# Allegro board panelized_board.brd
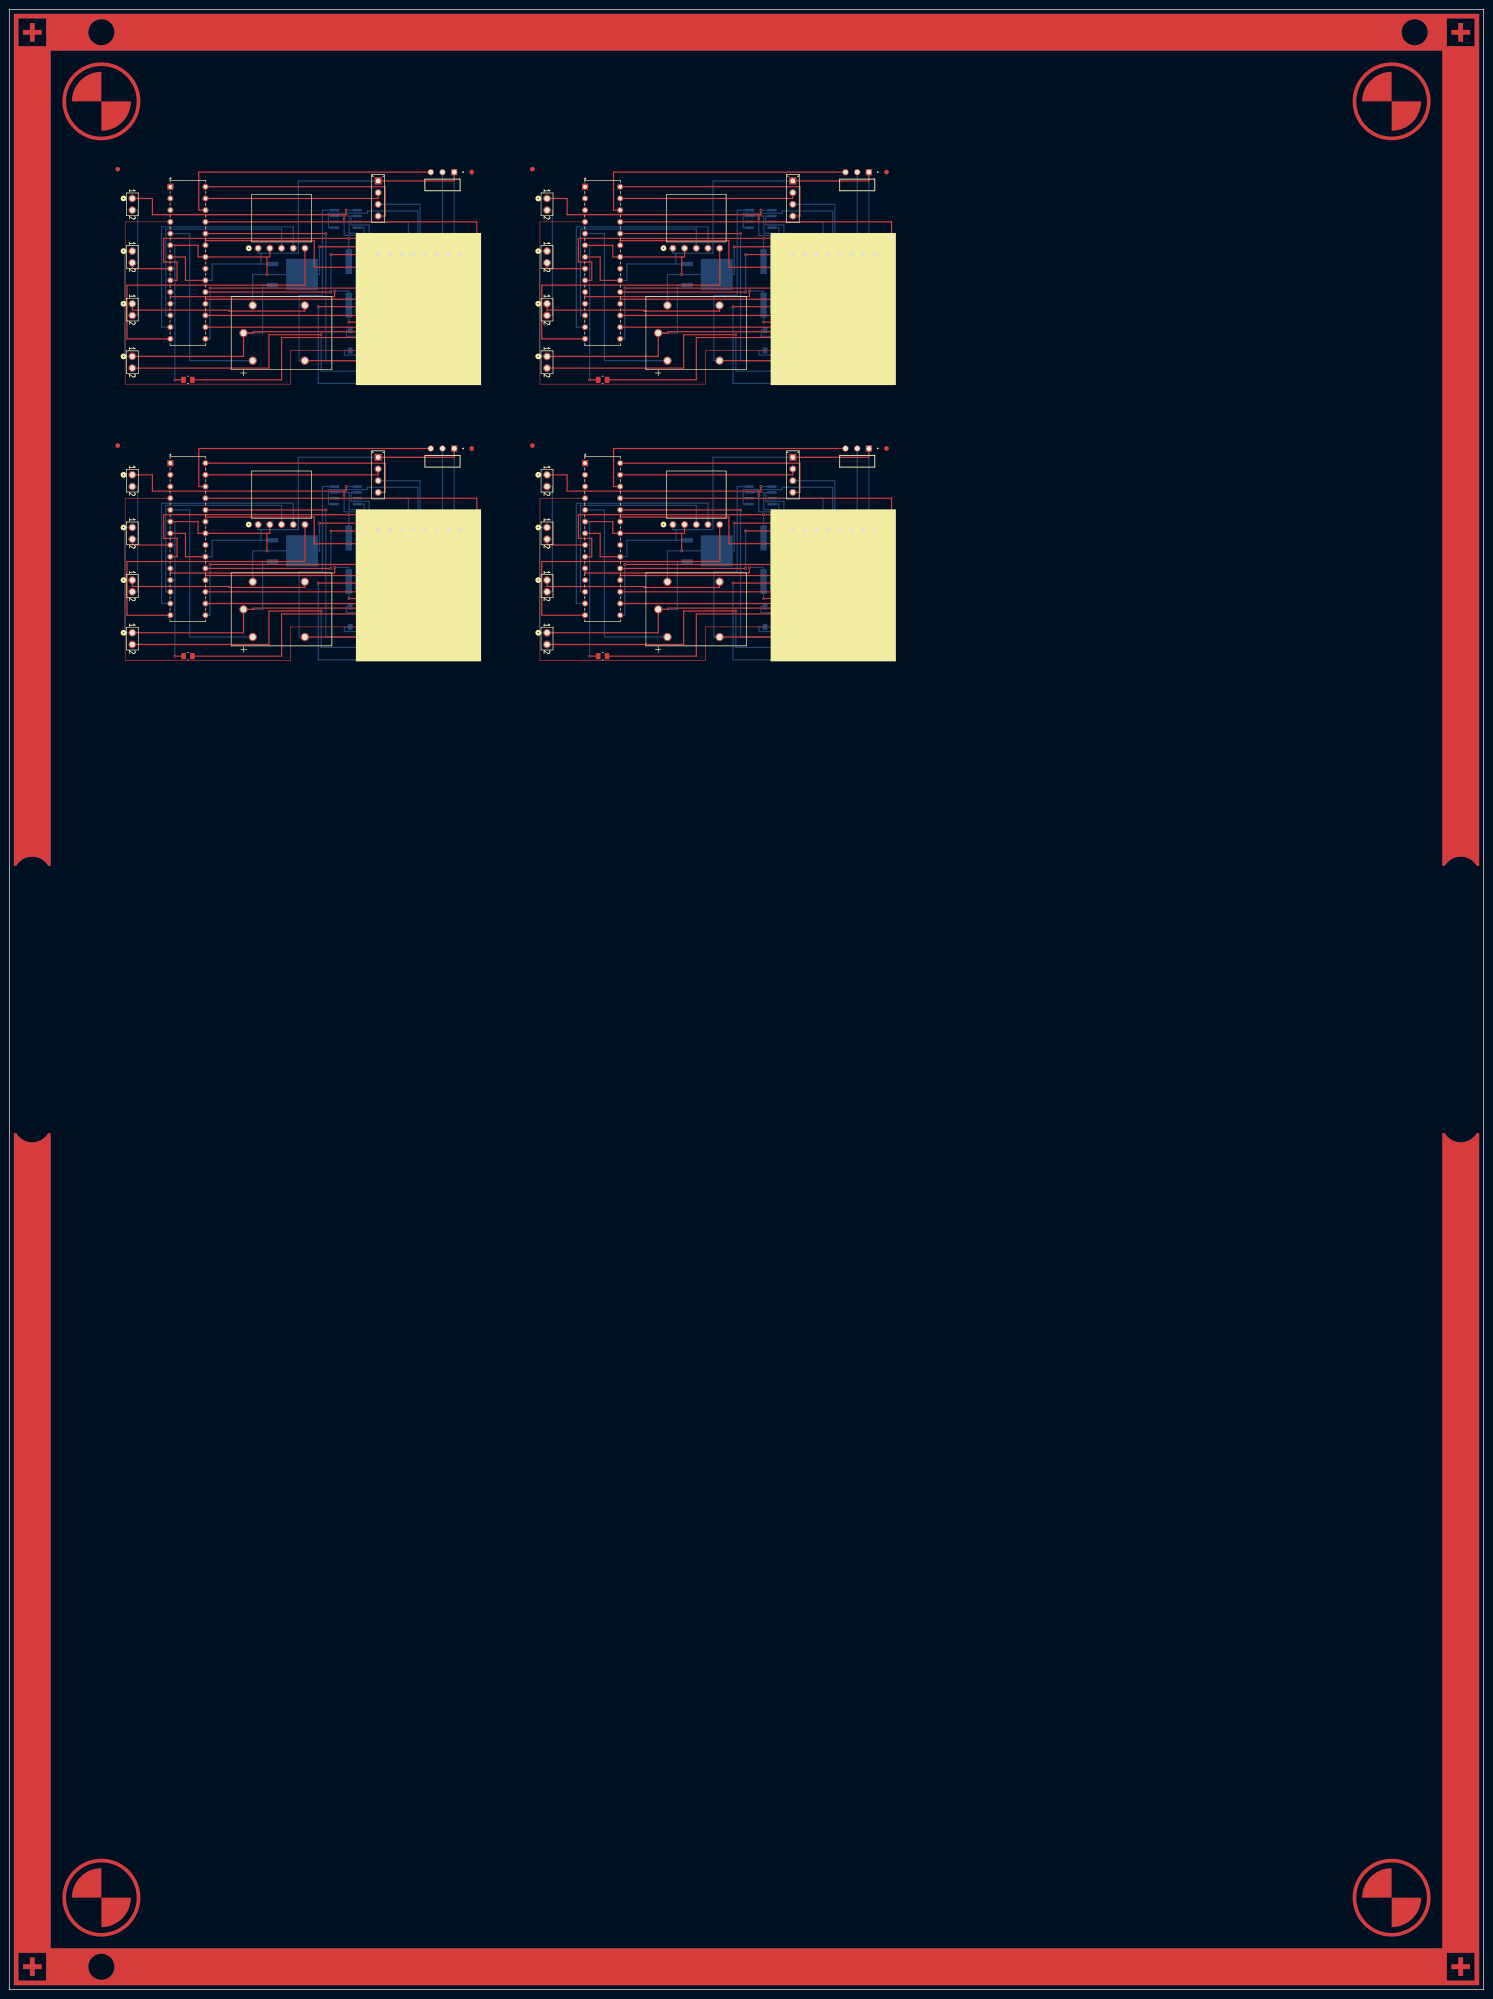
[diagram p0: board, top side]
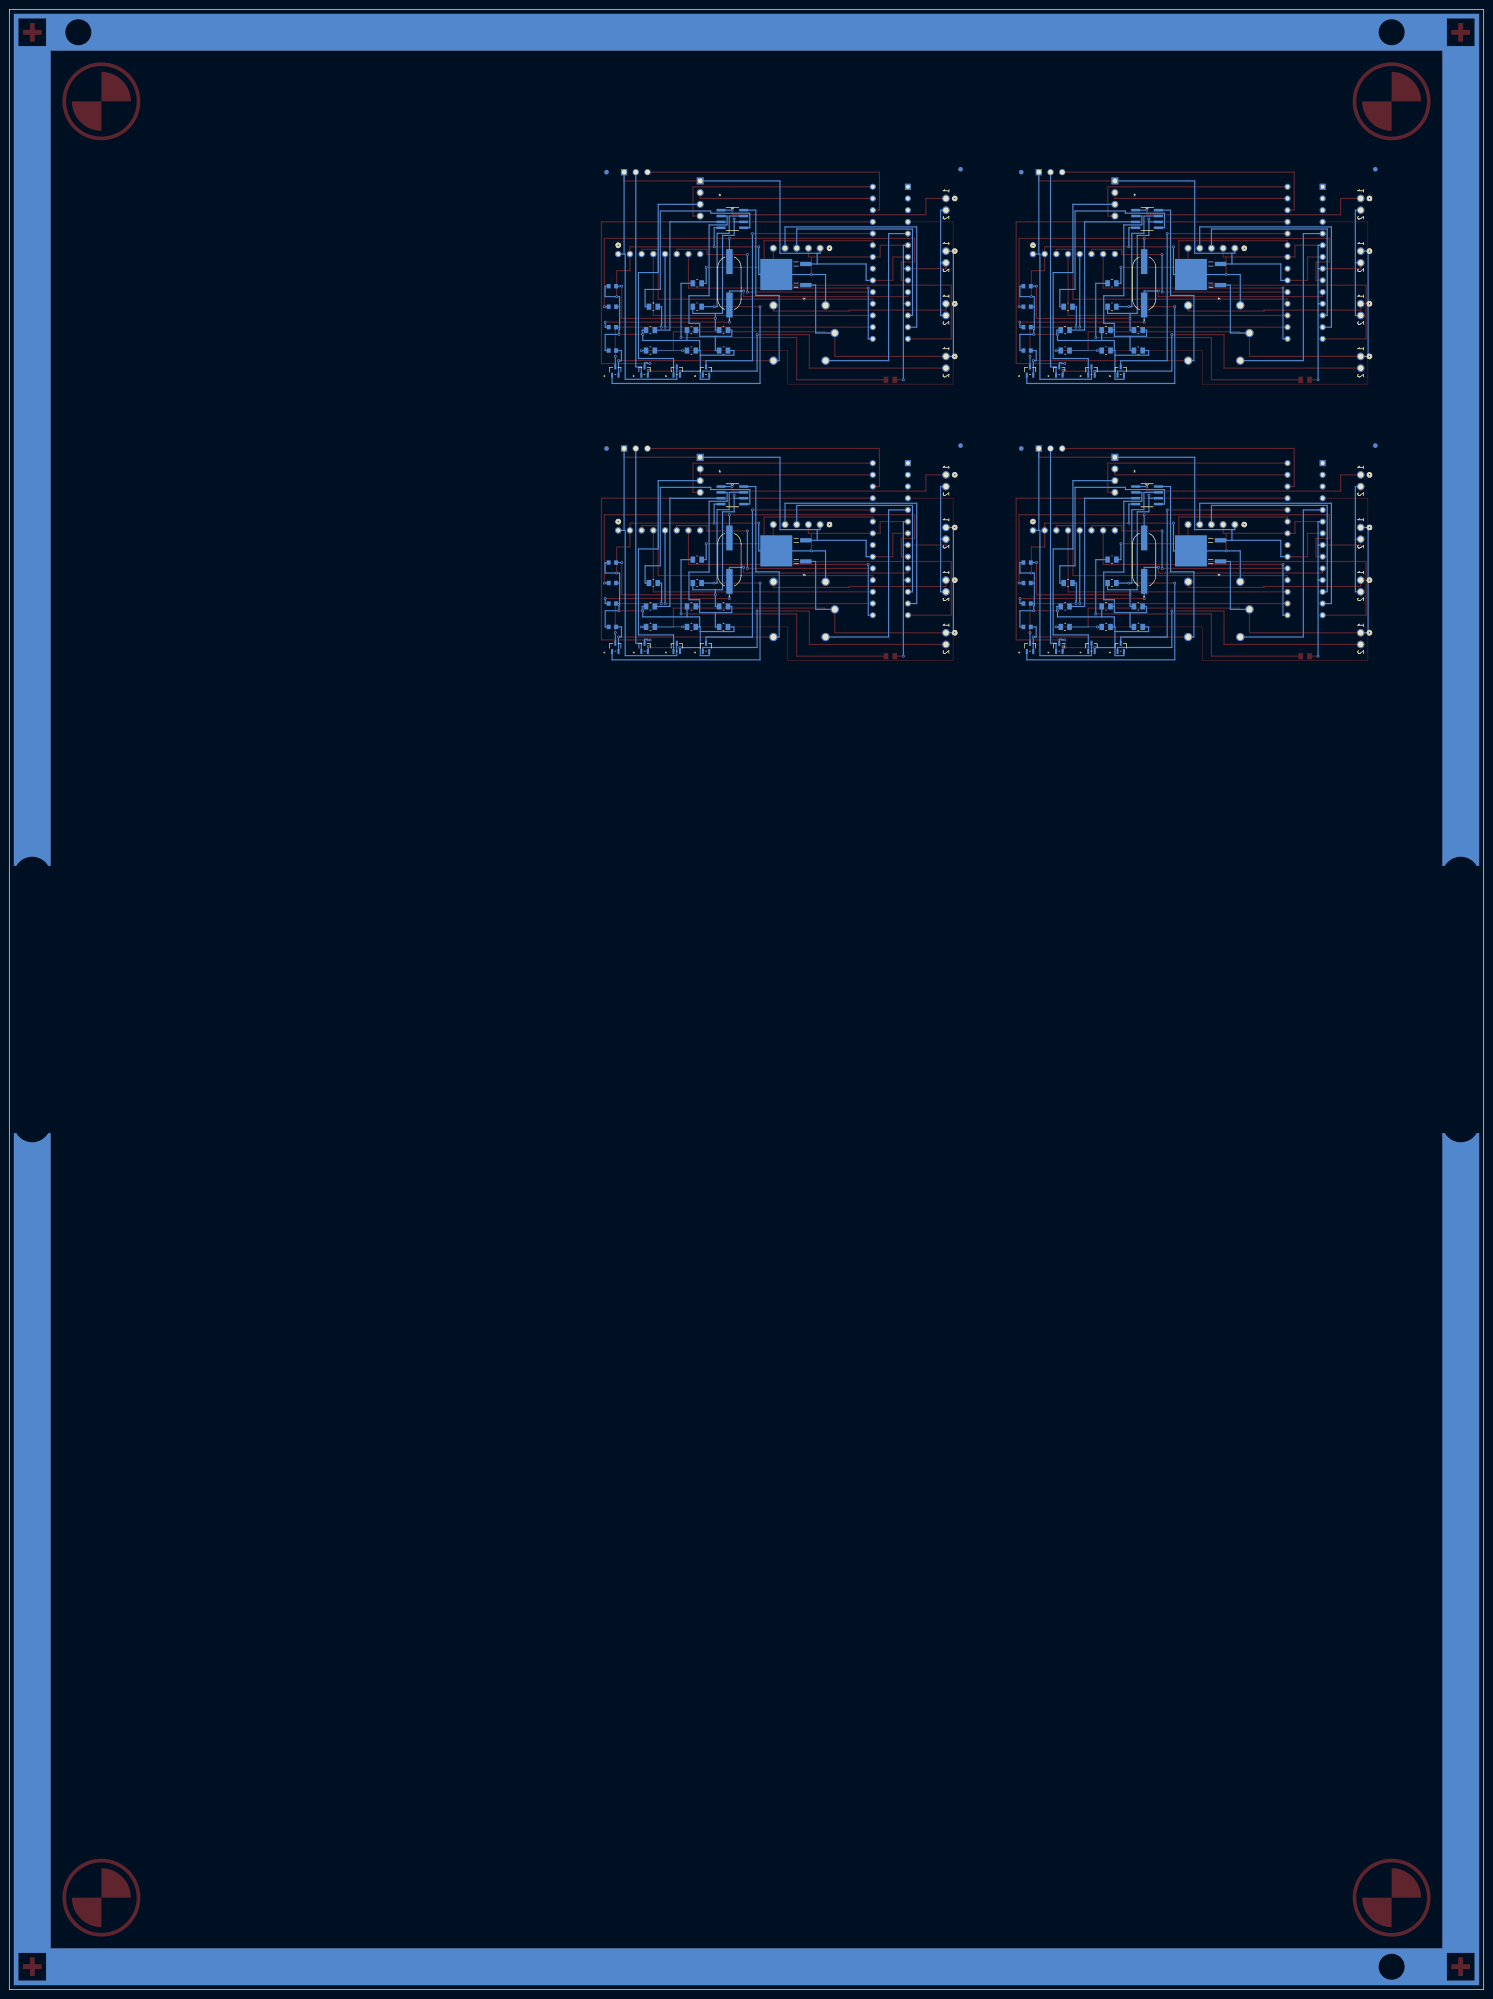
[diagram p1: board, bottom side, seen from below]

Outline 320 x 430 mm; copper layers: TOP, BOTTOM. Coordinates in mm from the lower left corner of the outline.

## Design rules (mm)
constraint set DEFAULT: min track width 0.127
nets with their own width: min track width 0.254; nets P1_GND P1_N38120 P1_N38132 P1_N38170 P1_N38194 P1_N38286 P1_N38318 P1_N38338 P1_N38498 P1_N38548 P1_N42817 P1_N42837 P1_N43205 P1_N43213 P1_N43273 P1_N43289 P1_N43297 P1_N43349 P1_N43399 P1_N43483 P1_N43487 P1_N43499 P1_N43549 P1_N43557 P1_N43597 P1_N43605 P1_N43613 P1_N43625 P1_N43633 P1_N435731 P1_SOL+ P1_SOL- P2_GND P2_N38120 P2_N38132 P2_N38170 P2_N38194 P2_N38286 P2_N38318 P2_N38338 P2_N38498 P2_N38548 P2_N42817 P2_N42837 P2_N43205 P2_N43213 P2_N43273 P2_N43289 P2_N43297 P2_N43349 P2_N43399 P2_N43483 P2_N43487 P2_N43499 P2_N43549 P2_N43557 P2_N43597 P2_N43605 P2_N43613 P2_N43625 P2_N43633 P2_N435731 P2_SOL+ P2_SOL- P3_GND P3_N38120 P3_N38132 P3_N38170 P3_N38194 P3_N38286 P3_N38318 P3_N38338 P3_N38498 P3_N38548 P3_N42817 P3_N42837 P3_N43205 P3_N43213 P3_N43273 P3_N43289 P3_N43297 P3_N43349 P3_N43399 P3_N43483 P3_N43487 P3_N43499 P3_N43549 P3_N43557 P3_N43597 P3_N43605 P3_N43613 P3_N43625 P3_N43633 P3_N435731 P3_SOL+ P3_SOL- P4_GND P4_N38120 P4_N38132 P4_N38170 P4_N38194 P4_N38286 P4_N38318 P4_N38338 P4_N38498 P4_N38548 P4_N42817 P4_N42837 P4_N43205 P4_N43213 P4_N43273 P4_N43289 P4_N43297 P4_N43349 P4_N43399 P4_N43483 P4_N43487 P4_N43499 P4_N43549 P4_N43557 P4_N43597 P4_N43605 P4_N43613 P4_N43625 P4_N43633 P4_N435731 P4_SOL+ P4_SOL-

## Placement (name value [footprint] x y rotation side)
NOREF  -  []  20 5 90 top
NOREF#2  -  []  20 425 0 top
NOREF#3  -  []  315 425 0 top
NOREF#4  -  []  315 425 90 top
NOREF#5  -  []  315 5 0 top
NOREF#6  -  [unnamed#2]  0 0 0 top
NOREF#7  -  [unnamed#3]  100.38 394.62 0 top
NOREF#8  -  [unnamed#3]  100.38 334.62 0 top
NOREF#9  -  []  320 0 90 top
NOREF#10  -  [unnamed#3]  23.54 335.26 0 top
NOREF#11  -  [unnamed#3]  190.38 334.62 0 top
NOREF#12  -  [unnamed#3]  23.54 395.26 0 top
NOREF#13  -  []  0 430 0 top
NOREF#14  -  []  0 0 90 top
NOREF#15  -  [unnamed#3]  113.54 395.26 0 top
NOREF#16  -  [unnamed#3]  113.54 335.26 0 top
NOREF#17  -  [unnamed#3]  190.38 394.62 0 top
NOREF#18  -  [unnamed#3]  100.38 394.62 180 bottom
NOREF#19  -  [unnamed#3]  190.38 334.62 180 bottom
NOREF#20  -  [unnamed#3]  100.38 334.62 180 bottom
NOREF#21  -  [unnamed#3]  113.54 335.26 180 bottom
NOREF#22  -  [unnamed#3]  190.38 394.62 180 bottom
NOREF#23  -  [unnamed#3]  23.54 395.26 180 bottom
NOREF#24  -  [unnamed#3]  113.54 395.26 180 bottom
NOREF#25  -  [unnamed#3]  23.54 335.26 180 bottom
P1_B1  12vDc  [CONN_5-146280-2_TYCO]  26.71 328.91 270 top
P1_B2  Bat.  [CONN_5-146280-2_TYCO]  26.71 317.48 270 top
P1_C1  1u  [0603_AVX]  99.11 295.89 180 bottom
P1_C2  22pF  [0603_AVX]  99.11 300.97 180 bottom
P1_C3  22pF  [0603_AVX]  99.11 305.42 180 bottom
P1_C4  .1u  [0603_AVX]  99.11 309.86 180 bottom
P1_CLK2  16Mhz  [XTAL_HC49SM-8-30-50-60-16-AT00]  73.7 310.5 90 bottom
P1_D1  PWR_LED  [0805_PAN]  38.78 289.54 0 top
P1_DHT1  DHT20  [CON4_1X4_P100UM_HDR2_TYC]  80.06 332.72 270 top
P1_J2  solenoid  [CONN_5-146280-2_TYCO]  26.71 294.62 270 top
P1_J3  SP+  [CONN_5-146280-2_TYCO]  26.71 306.05 270 top
P1_K1  RELAY_G5LE-1DC5  [RELAY_G5LE-1DC5_OMR]  50.84 299.7 90 top
P1_MS1  Moisture Sensor  [SAMTEC_TSW-103-25-S-S-RA]  96.56 334.62 0 top
P1_NM1  NMOS  [SOT-323_DIO]  78.78 291.44 180 bottom
P1_NM2  NMOS  [SOT-323_DIO]  85.14 291.44 180 bottom
P1_NM3  NMOS  [SOT-323_DIO]  92.12 291.44 180 bottom
P1_NM4  PMOS  [SOT-323_DIO]  98.47 291.44 180 bottom
P1_R1  1k  [0805_PAN]  80.69 310.5 180 bottom
P1_R2  .2  [0805_PAN]  80.69 305.42 180 bottom
P1_R3  1k  [0805_PAN]  90.22 305.42 180 bottom
P1_R4  15k  [0805_PAN]  81.96 300.33 180 bottom
P1_R5  2k  [0805_PAN]  90.85 300.33 180 bottom
P1_R6  4.6k  [0805_PAN]  74.97 300.33 180 bottom
P1_R7  470  [0805_PAN]  90.85 295.89 180 bottom
P1_R8  658  [0805_PAN]  81.96 295.89 180 bottom
P1_RTHERM  4.7k  [0805_PAN]  74.97 295.89 180 bottom
P1_SD1  SD_Card  [CON8_1X8_TU_TSW]  88.94 316.85 180 top
P1_U1  ATMEGA328-PU  [28P3_SPDIP28_SP_MCH]  34.97 331.45 0 top
P1_U2  LVR  [DPAK-3_ONS]  63.55 312.4 90 bottom
P1_U3  HC-05  [CON5_1X5_P100RM_SHDR_TYC]  54.02 318.12 0 top
P1_U4  BQ2057W_D_8  [D8]  73.07 324.46 180 bottom
P2_B1  12vDc  [CONN_5-146280-2_TYCO]  116.72 328.91 270 top
P2_B2  Bat.  [CONN_5-146280-2_TYCO]  116.72 317.48 270 top
P2_C1  1u  [0603_AVX]  189.1 295.89 180 bottom
P2_C2  22pF  [0603_AVX]  189.1 300.97 180 bottom
P2_C3  22pF  [0603_AVX]  189.1 305.42 180 bottom
P2_C4  .1u  [0603_AVX]  189.1 309.86 180 bottom
P2_CLK2  16Mhz  [XTAL_HC49SM-8-30-50-60-16-AT00]  163.71 310.5 90 bottom
P2_D1  PWR_LED  [0805_PAN]  128.78 289.54 0 top
P2_DHT1  DHT20  [CON4_1X4_P100UM_HDR2_TYC]  170.06 332.72 270 top
P2_J2  solenoid  [CONN_5-146280-2_TYCO]  116.72 294.62 270 top
P2_J3  SP+  [CONN_5-146280-2_TYCO]  116.72 306.05 270 top
P2_K1  RELAY_G5LE-1DC5  [RELAY_G5LE-1DC5_OMR]  140.84 299.7 90 top
P2_MS1  Moisture Sensor  [SAMTEC_TSW-103-25-S-S-RA]  186.56 334.62 0 top
P2_NM1  NMOS  [SOT-323_DIO]  168.78 291.44 180 bottom
P2_NM2  NMOS  [SOT-323_DIO]  175.13 291.44 180 bottom
P2_NM3  NMOS  [SOT-323_DIO]  182.12 291.44 180 bottom
P2_NM4  PMOS  [SOT-323_DIO]  188.47 291.44 180 bottom
P2_R1  1k  [0805_PAN]  170.69 310.5 180 bottom
P2_R2  .2  [0805_PAN]  170.69 305.42 180 bottom
P2_R3  1k  [0805_PAN]  180.22 305.42 180 bottom
P2_R4  15k  [0805_PAN]  171.96 300.33 180 bottom
P2_R5  2k  [0805_PAN]  180.85 300.33 180 bottom
P2_R6  4.6k  [0805_PAN]  164.97 300.33 180 bottom
P2_R7  470  [0805_PAN]  180.85 295.89 180 bottom
P2_R8  658  [0805_PAN]  171.96 295.89 180 bottom
P2_RTHERM  4.7k  [0805_PAN]  164.97 295.89 180 bottom
P2_SD1  SD_Card  [CON8_1X8_TU_TSW]  178.94 316.85 180 top
P2_U1  ATMEGA328-PU  [28P3_SPDIP28_SP_MCH]  124.97 331.45 0 top
P2_U2  LVR  [DPAK-3_ONS]  153.54 312.4 90 bottom
P2_U3  HC-05  [CON5_1X5_P100RM_SHDR_TYC]  144.02 318.12 0 top
P2_U4  BQ2057W_D_8  [D8]  163.07 324.46 180 bottom
P3_B1  12vDc  [CONN_5-146280-2_TYCO]  26.71 388.91 270 top
P3_B2  Bat.  [CONN_5-146280-2_TYCO]  26.71 377.48 270 top
P3_C1  1u  [0603_AVX]  99.11 355.89 180 bottom
P3_C2  22pF  [0603_AVX]  99.11 360.97 180 bottom
P3_C3  22pF  [0603_AVX]  99.11 365.42 180 bottom
P3_C4  .1u  [0603_AVX]  99.11 369.86 180 bottom
P3_CLK2  16Mhz  [XTAL_HC49SM-8-30-50-60-16-AT00]  73.7 370.5 90 bottom
P3_D1  PWR_LED  [0805_PAN]  38.78 349.54 0 top
P3_DHT1  DHT20  [CON4_1X4_P100UM_HDR2_TYC]  80.06 392.72 270 top
P3_J2  solenoid  [CONN_5-146280-2_TYCO]  26.71 354.62 270 top
P3_J3  SP+  [CONN_5-146280-2_TYCO]  26.71 366.05 270 top
P3_K1  RELAY_G5LE-1DC5  [RELAY_G5LE-1DC5_OMR]  50.84 359.7 90 top
P3_MS1  Moisture Sensor  [SAMTEC_TSW-103-25-S-S-RA]  96.56 394.62 0 top
P3_NM1  NMOS  [SOT-323_DIO]  78.78 351.44 180 bottom
P3_NM2  NMOS  [SOT-323_DIO]  85.14 351.44 180 bottom
P3_NM3  NMOS  [SOT-323_DIO]  92.12 351.44 180 bottom
P3_NM4  PMOS  [SOT-323_DIO]  98.47 351.44 180 bottom
P3_R1  1k  [0805_PAN]  80.69 370.5 180 bottom
P3_R2  .2  [0805_PAN]  80.69 365.42 180 bottom
P3_R3  1k  [0805_PAN]  90.22 365.42 180 bottom
P3_R4  15k  [0805_PAN]  81.96 360.33 180 bottom
P3_R5  2k  [0805_PAN]  90.85 360.33 180 bottom
P3_R6  4.6k  [0805_PAN]  74.97 360.33 180 bottom
P3_R7  470  [0805_PAN]  90.85 355.89 180 bottom
P3_R8  658  [0805_PAN]  81.96 355.89 180 bottom
P3_RTHERM  4.7k  [0805_PAN]  74.97 355.89 180 bottom
P3_SD1  SD_Card  [CON8_1X8_TU_TSW]  88.94 376.85 180 top
P3_U1  ATMEGA328-PU  [28P3_SPDIP28_SP_MCH]  34.97 391.45 0 top
P3_U2  LVR  [DPAK-3_ONS]  63.55 372.4 90 bottom
P3_U3  HC-05  [CON5_1X5_P100RM_SHDR_TYC]  54.02 378.12 0 top
P3_U4  BQ2057W_D_8  [D8]  73.07 384.46 180 bottom
P4_B1  12vDc  [CONN_5-146280-2_TYCO]  116.72 388.91 270 top
P4_B2  Bat.  [CONN_5-146280-2_TYCO]  116.72 377.48 270 top
P4_C1  1u  [0603_AVX]  189.1 355.89 180 bottom
P4_C2  22pF  [0603_AVX]  189.1 360.97 180 bottom
P4_C3  22pF  [0603_AVX]  189.1 365.42 180 bottom
P4_C4  .1u  [0603_AVX]  189.1 369.86 180 bottom
P4_CLK2  16Mhz  [XTAL_HC49SM-8-30-50-60-16-AT00]  163.71 370.5 90 bottom
P4_D1  PWR_LED  [0805_PAN]  128.78 349.54 0 top
P4_DHT1  DHT20  [CON4_1X4_P100UM_HDR2_TYC]  170.06 392.72 270 top
P4_J2  solenoid  [CONN_5-146280-2_TYCO]  116.72 354.62 270 top
P4_J3  SP+  [CONN_5-146280-2_TYCO]  116.72 366.05 270 top
P4_K1  RELAY_G5LE-1DC5  [RELAY_G5LE-1DC5_OMR]  140.84 359.7 90 top
P4_MS1  Moisture Sensor  [SAMTEC_TSW-103-25-S-S-RA]  186.56 394.62 0 top
P4_NM1  NMOS  [SOT-323_DIO]  168.78 351.44 180 bottom
P4_NM2  NMOS  [SOT-323_DIO]  175.13 351.44 180 bottom
P4_NM3  NMOS  [SOT-323_DIO]  182.12 351.44 180 bottom
P4_NM4  PMOS  [SOT-323_DIO]  188.47 351.44 180 bottom
P4_R1  1k  [0805_PAN]  170.69 370.5 180 bottom
P4_R2  .2  [0805_PAN]  170.69 365.42 180 bottom
P4_R3  1k  [0805_PAN]  180.22 365.42 180 bottom
P4_R4  15k  [0805_PAN]  171.96 360.33 180 bottom
P4_R5  2k  [0805_PAN]  180.85 360.33 180 bottom
P4_R6  4.6k  [0805_PAN]  164.97 360.33 180 bottom
P4_R7  470  [0805_PAN]  180.85 355.89 180 bottom
P4_R8  658  [0805_PAN]  171.96 355.89 180 bottom
P4_RTHERM  4.7k  [0805_PAN]  164.97 355.89 180 bottom
P4_SD1  SD_Card  [CON8_1X8_TU_TSW]  178.94 376.85 180 top
P4_U1  ATMEGA328-PU  [28P3_SPDIP28_SP_MCH]  124.97 391.45 0 top
P4_U2  LVR  [DPAK-3_ONS]  153.54 372.4 90 bottom
P4_U3  HC-05  [CON5_1X5_P100RM_SHDR_TYC]  144.02 378.12 0 top
P4_U4  BQ2057W_D_8  [D8]  163.07 384.46 180 bottom

## Library data of the parts
P1_B1 P1_B2 P2_B1 P2_B2 P3_B1 P3_B2 P4_B1 P4_B2 = Battery
P1_C1 P1_C2 P2_C1 P2_C2 P3_C1 P3_C2 P4_C1 P4_C2 = C: User Part Number: PN; Tolerance: TOL
P1_C3 P1_C4 P2_C3 P2_C4 P3_C3 P3_C4 P4_C3 P4_C4 = C
P1_CLK2 P2_CLK2 P3_CLK2 P4_CLK2 = Clock: User Part Number: PN; Tolerance: TOL
P1_D1 P2_D1 P3_D1 P4_D1 = MBR7545
P1_DHT1 P2_DHT1 P3_DHT1 P4_DHT1 = DHT20
P1_J2 P1_J3 P2_J2 P2_J3 P3_J2 P3_J3 P4_J2 P4_J3 = 2-pin_header
P1_K1 P2_K1 P3_K1 P4_K1 = G5LE-1DC24
P1_MS1 P2_MS1 P3_MS1 P4_MS1 = Moisture Sensor
P1_NM1-P1_NM4 P2_NM1-P2_NM4 P3_NM1-P3_NM4 P4_NM1-P4_NM4 = N-channel mosfet
P1_R1 P1_R3-P1_R8 P2_R1 P2_R3-P2_R8 P3_R1 P3_R3-P3_R8 P4_R1 P4_R3-P4_R8 = R
P1_R2 P2_R2 P3_R2 P4_R2 = R: User Part Number: PN
P1_RTHERM P2_RTHERM P3_RTHERM P4_RTHERM = R: User Part Number: PN; Tolerance: TOL
P1_SD1 P2_SD1 P3_SD1 P4_SD1 = SD_Card
P1_U1 P2_U1 P3_U1 P4_U1 = ATMEGA328-PU
P1_U2 P2_U2 P3_U2 P4_U2 = LVR: User Part Number: PN; Tolerance: TOL
P1_U3 P2_U3 P3_U3 P4_U3 = HC-05
P1_U4 P2_U4 P3_U4 P4_U4 = BQ2057WSNTR

## Footprints (pads in the part's own frame, mm; a bottom-side part is the same pattern mirrored in y, then rotated)
28P3_SPDIP28_SP_MCH
  rect 1.321x1.321 hole 0.813: 1(0,0)
  round 1.321 hole 0.813: 2(0,-2.54) 3(0,-5.08) 4(0,-7.62) 5(0,-10.16) 6(0,-12.7) 7(0,-15.24) 8(0,-17.78) 9(0,-20.32) 10(0,-22.86) 11(0,-25.4) 12(0,-27.94) 13(0,-30.48) 14(0,-33.02) 15(7.62,-33.02) 16(7.62,-30.48) 17(7.62,-27.94) 18(7.62,-25.4) 19(7.62,-22.86) 20(7.62,-20.32) 21(7.62,-17.78) 22(7.62,-15.24) 23(7.62,-12.7) 24(7.62,-10.16) 25(7.62,-7.62) 26(7.62,-5.08) 27(7.62,-2.54) 28(7.62,0)
0603_AVX
  rect 0.864x0.965 smd: 1(-0.8,0) 2(0.8,0)
0805_PAN
  rect 1.016x1.346 smd: 1(-0.953,0) 2(0.953,0)
CON4_1X4_P100UM_HDR2_TYC
  rect 1.524x1.524 hole 1.016: 1(0,0)
  round 1.524 hole 1.016: 2(2.54,0) 3(5.08,0) 4(7.62,0)
CON5_1X5_P100RM_SHDR_TYC
  round 1.524 hole 1.016: 1(0,0) 2(2.54,0) 3(5.08,0) 4(7.62,0) 5(10.16,0)
CON8_1X8_TU_TSW
  round 1.397 hole 0.889: 1(-8.89,0) 2(-6.35,0) 3(-3.81,0) 4(-1.27,0) 5(1.27,0) 6(3.81,0) 7(6.35,0) 8(8.89,0)
CONN_5-146280-2_TYCO
  round 1.651 hole 1.143: 1(0,0) 2(2.54,0)
D8
  rect 1.981x0.559 smd: 1(-2.464,1.905) 2(-2.464,0.635) 3(-2.464,-0.635) 4(-2.464,-1.905) 5(2.464,-1.905) 6(2.464,-0.635) 7(2.464,0.635) 8(2.464,1.905)
DPAK-3_ONS
  rect 0.94x2.489 smd: 1(-2.29,-6.413) 3(2.29,-6.413)
  rect 6.782x6.934 smd: 2(0,0)
RELAY_G5LE-1DC5_OMR
  round 1.808 hole 1.3: 1(0,0) 2(-6,-2) 3(-6,-13.3) 4(6,-13.3) 5(6,-2)
SAMTEC_TSW-103-25-S-S-RA
  rect 1.37x1.37 hole 1.02: 01(0,0)
  round 1.37 hole 1.02: 02(-2.54,0) 03(-5.08,0)
SOT-323_DIO
  rect 0.451x1.111 smd: 1(-0.7,-0.9) 2(0.7,-0.9) 3(0,0.9)
unnamed#2
  custom 4x4 smd: (5,425) (5,425) (5,5) (5,5) (315,425) (315,425) (315,5) (315,5)
  round 0 hole 2.8 unplated: (20,425) (20,5) (305,425)
unnamed#3
  round 1.001 smd: (0,0)
XTAL_HC49SM-8-30-50-60-16-AT00
  rect 5.41x1.397 smd: 1(-4.712,0) 2(4.712,0)

## Nets
P1_GND: P1_B1.2(-) P1_B2.2(-) P1_C1.1 P1_C2.2 P1_C3.2 P1_C4.1 P1_D1.1(2) P1_J3.2 P1_K1.5 P1_NM1.2 P1_NM2.2 P1_NM3.2 P1_R4.1 P1_R5.1 P1_R8.2 P1_RTHERM.2 P1_SD1.2(GND) P1_U1.6 P1_U1.8 P1_U1.11 P1_U1.22 P1_U2.2 P1_U3.2 P1_U4.4(VSS)
P1_N38120: P1_B1.1 P1_C4.2 P1_R2.1 P1_R6.1 P1_U4.1 P1_U4.6
P1_N38132: P1_NM4.1 P1_R2.2 P1_U4.7
P1_N38170: P1_C1.2 P1_K1.3 P1_NM4.2 P1_U4.8
P1_N38194: P1_NM4.3 P1_R3.2
P1_N38286: P1_R3.1 P1_U4.5
P1_N38318: P1_R5.2 P1_U4.3
P1_N38338: P1_R4.2 P1_R6.2 P1_RTHERM.1 P1_U4.2
P1_N38498: P1_J3.1 P1_K1.4
P1_N38548: P1_K1.2 P1_U1.5
P1_N38656: P1_R7.2 P1_R8.1 P1_U1.4
P1_N42817: P1_NM1.3 P1_U1.24
P1_N42837: P1_DHT1.1(VCC) P1_MS1.01(VCC) P1_NM2.3 P1_SD1.1 P1_U1.7(VCC) P1_U1.20 P1_U2.3(OUTPUT) P1_U3.1(VCC)
P1_N43205: P1_C3.1 P1_CLK2.2 P1_U1.9
P1_N43213: P1_DHT1.4 P1_U1.28
P1_N43273: P1_DHT1.2 P1_U1.27
P1_N43289: P1_DHT1.3 P1_NM2.1
P1_N43297: P1_MS1.03 P1_U1.26
P1_N43349: P1_NM3.3 P1_U1.25
P1_N43399: P1_R1.2 P1_U1.23
P1_N43483: P1_C2.1 P1_CLK2.1 P1_U1.10
P1_N43487: P1_SD1.6 P1_U1.19
P1_N43499: P1_SD1.3 P1_U1.18
P1_N43549: P1_U1.12 P1_U3.3
P1_N43557: P1_SD1.4 P1_U1.17
P1_N43597: P1_U1.13 P1_U3.4
P1_N43605: P1_SD1.5 P1_U1.16
P1_N43613: P1_MS1.02 P1_NM3.1
P1_N43625: P1_U1.14 P1_U3.5
P1_N43633: P1_SD1.7 P1_U1.15
P1_N435731: P1_D1.2 P1_R1.1
P1_SOL+: P1_B2.1 P1_J2.1 P1_K1.1 P1_R7.1 P1_U2.1
P1_SOL-: P1_J2.2 P1_NM1.1
P2_GND: P2_B1.2(-) P2_B2.2(-) P2_C1.1 P2_C2.2 P2_C3.2 P2_C4.1 P2_D1.1(2) P2_J3.2 P2_K1.5 P2_NM1.2 P2_NM2.2 P2_NM3.2 P2_R4.1 P2_R5.1 P2_R8.2 P2_RTHERM.2 P2_SD1.2(GND) P2_U1.6 P2_U1.8 P2_U1.11 P2_U1.22 P2_U2.2 P2_U3.2 P2_U4.4(VSS)
P2_N38120: P2_B1.1 P2_C4.2 P2_R2.1 P2_R6.1 P2_U4.1 P2_U4.6
P2_N38132: P2_NM4.1 P2_R2.2 P2_U4.7
P2_N38170: P2_C1.2 P2_K1.3 P2_NM4.2 P2_U4.8
P2_N38194: P2_NM4.3 P2_R3.2
P2_N38286: P2_R3.1 P2_U4.5
P2_N38318: P2_R5.2 P2_U4.3
P2_N38338: P2_R4.2 P2_R6.2 P2_RTHERM.1 P2_U4.2
P2_N38498: P2_J3.1 P2_K1.4
P2_N38548: P2_K1.2 P2_U1.5
P2_N38656: P2_R7.2 P2_R8.1 P2_U1.4
P2_N42817: P2_NM1.3 P2_U1.24
P2_N42837: P2_DHT1.1(VCC) P2_MS1.01(VCC) P2_NM2.3 P2_SD1.1 P2_U1.7(VCC) P2_U1.20 P2_U2.3(OUTPUT) P2_U3.1(VCC)
P2_N43205: P2_C3.1 P2_CLK2.2 P2_U1.9
P2_N43213: P2_DHT1.4 P2_U1.28
P2_N43273: P2_DHT1.2 P2_U1.27
P2_N43289: P2_DHT1.3 P2_NM2.1
P2_N43297: P2_MS1.03 P2_U1.26
P2_N43349: P2_NM3.3 P2_U1.25
P2_N43399: P2_R1.2 P2_U1.23
P2_N43483: P2_C2.1 P2_CLK2.1 P2_U1.10
P2_N43487: P2_SD1.6 P2_U1.19
P2_N43499: P2_SD1.3 P2_U1.18
P2_N43549: P2_U1.12 P2_U3.3
P2_N43557: P2_SD1.4 P2_U1.17
P2_N43597: P2_U1.13 P2_U3.4
P2_N43605: P2_SD1.5 P2_U1.16
P2_N43613: P2_MS1.02 P2_NM3.1
P2_N43625: P2_U1.14 P2_U3.5
P2_N43633: P2_SD1.7 P2_U1.15
P2_N435731: P2_D1.2 P2_R1.1
P2_SOL+: P2_B2.1 P2_J2.1 P2_K1.1 P2_R7.1 P2_U2.1
P2_SOL-: P2_J2.2 P2_NM1.1
P3_GND: P3_B1.2(-) P3_B2.2(-) P3_C1.1 P3_C2.2 P3_C3.2 P3_C4.1 P3_D1.1(2) P3_J3.2 P3_K1.5 P3_NM1.2 P3_NM2.2 P3_NM3.2 P3_R4.1 P3_R5.1 P3_R8.2 P3_RTHERM.2 P3_SD1.2(GND) P3_U1.6 P3_U1.8 P3_U1.11 P3_U1.22 P3_U2.2 P3_U3.2 P3_U4.4(VSS)
P3_N38120: P3_B1.1 P3_C4.2 P3_R2.1 P3_R6.1 P3_U4.1 P3_U4.6
P3_N38132: P3_NM4.1 P3_R2.2 P3_U4.7
P3_N38170: P3_C1.2 P3_K1.3 P3_NM4.2 P3_U4.8
P3_N38194: P3_NM4.3 P3_R3.2
P3_N38286: P3_R3.1 P3_U4.5
P3_N38318: P3_R5.2 P3_U4.3
P3_N38338: P3_R4.2 P3_R6.2 P3_RTHERM.1 P3_U4.2
P3_N38498: P3_J3.1 P3_K1.4
P3_N38548: P3_K1.2 P3_U1.5
P3_N38656: P3_R7.2 P3_R8.1 P3_U1.4
P3_N42817: P3_NM1.3 P3_U1.24
P3_N42837: P3_DHT1.1(VCC) P3_MS1.01(VCC) P3_NM2.3 P3_SD1.1 P3_U1.7(VCC) P3_U1.20 P3_U2.3(OUTPUT) P3_U3.1(VCC)
P3_N43205: P3_C3.1 P3_CLK2.2 P3_U1.9
P3_N43213: P3_DHT1.4 P3_U1.28
P3_N43273: P3_DHT1.2 P3_U1.27
P3_N43289: P3_DHT1.3 P3_NM2.1
P3_N43297: P3_MS1.03 P3_U1.26
P3_N43349: P3_NM3.3 P3_U1.25
P3_N43399: P3_R1.2 P3_U1.23
P3_N43483: P3_C2.1 P3_CLK2.1 P3_U1.10
P3_N43487: P3_SD1.6 P3_U1.19
P3_N43499: P3_SD1.3 P3_U1.18
P3_N43549: P3_U1.12 P3_U3.3
P3_N43557: P3_SD1.4 P3_U1.17
P3_N43597: P3_U1.13 P3_U3.4
P3_N43605: P3_SD1.5 P3_U1.16
P3_N43613: P3_MS1.02 P3_NM3.1
P3_N43625: P3_U1.14 P3_U3.5
P3_N43633: P3_SD1.7 P3_U1.15
P3_N435731: P3_D1.2 P3_R1.1
P3_SOL+: P3_B2.1 P3_J2.1 P3_K1.1 P3_R7.1 P3_U2.1
P3_SOL-: P3_J2.2 P3_NM1.1
P4_GND: P4_B1.2(-) P4_B2.2(-) P4_C1.1 P4_C2.2 P4_C3.2 P4_C4.1 P4_D1.1(2) P4_J3.2 P4_K1.5 P4_NM1.2 P4_NM2.2 P4_NM3.2 P4_R4.1 P4_R5.1 P4_R8.2 P4_RTHERM.2 P4_SD1.2(GND) P4_U1.6 P4_U1.8 P4_U1.11 P4_U1.22 P4_U2.2 P4_U3.2 P4_U4.4(VSS)
P4_N38120: P4_B1.1 P4_C4.2 P4_R2.1 P4_R6.1 P4_U4.1 P4_U4.6
P4_N38132: P4_NM4.1 P4_R2.2 P4_U4.7
P4_N38170: P4_C1.2 P4_K1.3 P4_NM4.2 P4_U4.8
P4_N38194: P4_NM4.3 P4_R3.2
P4_N38286: P4_R3.1 P4_U4.5
P4_N38318: P4_R5.2 P4_U4.3
P4_N38338: P4_R4.2 P4_R6.2 P4_RTHERM.1 P4_U4.2
P4_N38498: P4_J3.1 P4_K1.4
P4_N38548: P4_K1.2 P4_U1.5
P4_N38656: P4_R7.2 P4_R8.1 P4_U1.4
P4_N42817: P4_NM1.3 P4_U1.24
P4_N42837: P4_DHT1.1(VCC) P4_MS1.01(VCC) P4_NM2.3 P4_SD1.1 P4_U1.7(VCC) P4_U1.20 P4_U2.3(OUTPUT) P4_U3.1(VCC)
P4_N43205: P4_C3.1 P4_CLK2.2 P4_U1.9
P4_N43213: P4_DHT1.4 P4_U1.28
P4_N43273: P4_DHT1.2 P4_U1.27
P4_N43289: P4_DHT1.3 P4_NM2.1
P4_N43297: P4_MS1.03 P4_U1.26
P4_N43349: P4_NM3.3 P4_U1.25
P4_N43399: P4_R1.2 P4_U1.23
P4_N43483: P4_C2.1 P4_CLK2.1 P4_U1.10
P4_N43487: P4_SD1.6 P4_U1.19
P4_N43499: P4_SD1.3 P4_U1.18
P4_N43549: P4_U1.12 P4_U3.3
P4_N43557: P4_SD1.4 P4_U1.17
P4_N43597: P4_U1.13 P4_U3.4
P4_N43605: P4_SD1.5 P4_U1.16
P4_N43613: P4_MS1.02 P4_NM3.1
P4_N43625: P4_U1.14 P4_U3.5
P4_N43633: P4_SD1.7 P4_U1.15
P4_N435731: P4_D1.2 P4_R1.1
P4_SOL+: P4_B2.1 P4_J2.1 P4_K1.1 P4_R7.1 P4_U2.1
P4_SOL-: P4_J2.2 P4_NM1.1

Pads without a net: P1_SD1 8; P1_U1 1 2 3 21; P2_SD1 8; P2_U1 1 2 3 21; P3_SD1 8; P3_U1 1 2 3 21; P4_SD1 8; P4_U1 1 2 3 21

## Via types
v1: diameter 0.61, hole 0.33, TOP to BOTTOM, 136 vias

## Routing (per net, layer and track width the routed paths; a pad name or vN(x,y) marks a point on that pad's centre or on a via; arc(x,y) is an arc through that point)
P1_GND: length 255.8
  TOP w0.254: v1(84.44,291.41) 90.69,291.41 90.69,291.61 v1(91.32,291.61) ; P1_U3.2 56.56,316.21 55.92,316.21 ; v1(98.18,307.6) 98.18,313.24 95.3,313.24 95.3,318.42 v1(77.02,318.42) v1(67.34,318.42) ; v1(97.67,299.4) v1(92.51,299.4) ; P1_B2.2 26.71,313.67 P1_U1.8 ; 55.92,316.21 P1_U1.22 40.99,316.21 40.99,318.75 P1_U1.6 ; 55.92,316.21 v1(55.92,312.4) ; P1_D1.1 v1(35.96,289.54)
  BOTTOM w0.254: 35.96,306.05 P1_U1.11 ; 35.96,306.05 35.96,313.67 ; 35.96,306.05 v1(35.96,289.54) ; P1_C1.1 100.67,295.89 100.67,299.4 v1(97.67,299.4) 97.67,300.49 97.54,300.49 97.54,300.97 ; 27.87,314.94 27.87,303.51 P1_J3.2 ; 27.87,314.94 27.87,326.37 P1_B1.2 ; 27.87,314.94 P1_B2.2 ; 82.91,298.07 80.17,298.07 80.17,295.89 ; 82.91,298.07 P1_R4.1 ; 82.91,298.07 92.51,298.07 v1(92.51,299.4) 92.64,299.4 92.64,300.33 P1_R5.1 ; 35.96,313.67 P1_U1.8 ; 35.96,313.67 35.96,318.75 P1_U1.6 ; P1_NM1.2 78.08,289.66 80.04,289.66 80.04,291.41 ; P1_C2.2 97.54,300.97 ; 97.54,300.97 97.54,305.42 ; 97.54,305.42 97.54,307.6 v1(98.18,307.6) 100.67,307.6 100.67,309.86 P1_C4.1 ; 97.54,305.42 P1_C3.2 ; 80.04,294.89 80.04,291.41 ; 80.04,294.89 72.73,294.89 72.73,295.89 P1_RTHERM.2 ; 80.04,294.89 80.04,295.89 80.17,295.89 ; 80.04,291.41 v1(84.44,291.41) P1_NM2.2 ; P1_R8.2 80.17,295.89 ; v1(67.34,318.42) 67.34,312.4 P1_U2.2 v1(55.92,312.4) 52.84,312.4 P1_K1.5 ; v1(77.02,318.42) 77.02,322.56 P1_U4.4 ; P1_NM3.2 91.32,290.55 v1(91.32,291.61)
P1_N38120: length 120.2
  TOP w0.254: v1(76.77,302.88) 97.09,302.88 v1(97.09,309.86) ; v1(72.68,324.46) 72.68,325.38 ; 72.68,325.38 73.12,325.38 v1(73.12,326.37) ; 72.68,325.38 31.07,325.38 31.07,328.91 P1_B1.1
  BOTTOM w0.254: P1_R6.1 76.77,300.33 v1(76.77,302.88) 76.77,303.95 ; 76.77,303.95 75.2,303.95 75.2,320.88 72.68,320.88 72.68,323.83 ; 76.77,303.95 81.64,303.95 P1_R2.1 ; 72.68,323.83 P1_U4.6 ; 72.68,323.83 v1(72.68,324.46) ; P1_U4.1 v1(73.12,326.37) ; P1_C4.2 v1(97.09,309.86)
P1_N38132: length 89.4
  TOP w0.254: v1(67.06,305.42) v1(77.02,305.42)
  BOTTOM w0.254: v1(67.06,305.42) 67.06,288.74 99.17,288.74 P1_NM4.1 ; P1_U4.7 73.76,325.1 73.76,321.34 76.38,321.34 76.38,305.42 v1(77.02,305.42) P1_R2.2
P1_N38170: length 82.4
  TOP w0.254: v1(97.77,293.7) P1_K1.3
  BOTTOM w0.254: P1_U4.8 67.98,326.37 67.98,307.85 62.91,307.85 62.91,293.7 P1_K1.3 ; P1_NM4.2 v1(97.77,293.7) 97.14,293.7 97.14,295.89 P1_C1.2
P1_N38194: length 24
  TOP w0.254: v1(88.49,300.97) 98.47,300.97 v1(98.47,294.65)
  BOTTOM w0.254: P1_R3.2 88.42,305.42 88.42,301.61 88.49,301.61 v1(88.49,300.97) ; P1_NM4.3 v1(98.47,294.65)
P1_N38286: length 49.3
  BOTTOM w0.254: P1_U4.5 69.29,322.56 69.29,325.71 77.77,325.71 77.77,326.19 88.7,326.19 88.7,309.16 92.01,309.16 92.01,305.42 P1_R3.1
P1_N38318: length 37.9
  BOTTOM w0.254: P1_R5.2 86.62,300.33 86.62,323.83 P1_U4.3
P1_N38338: length 52
  BOTTOM w0.254: 80.17,300.33 80.17,301.8 82.48,301.8 82.48,307.79 78.11,307.79 78.11,323.17 74.21,323.17 74.21,325.1 P1_U4.2 ; 80.17,300.33 80.17,298.99 76.77,298.99 ; 80.17,300.33 P1_R4.2 ; 76.77,298.99 73.18,298.99 73.18,300.33 P1_R6.2 ; 76.77,298.99 76.77,295.89 P1_RTHERM.1
P1_N38498: length 40.2
  TOP w0.254: P1_K1.4 64.14,304.47 47.7,304.47 47.7,304.67 26.71,304.67 P1_J3.1
P1_N38548: length 45.5
  BOTTOM w0.254: P1_U1.5 39.16,321.29 39.16,293.7 P1_K1.2
P1_N38656: length 118
  TOP w0.127: P1_U1.4 25.17,323.83 25.17,288.6 61.08,288.6 61.08,295.89 v1(83.85,295.89)
  BOTTOM w0.127: P1_R7.2 v1(83.85,295.89) P1_R8.1
P1_N42817: length 65.1
  TOP w0.254: P1_U1.24 v1(68.71,321.29)
  BOTTOM w0.254: v1(68.71,321.29) 68.71,293.69 78.78,293.69 P1_NM1.3
P1_N42837: length 154.7
  TOP w0.254: P1_U1.20 38.25,311.13 38.25,316.21 P1_U1.7 ; P1_MS1.01 96.56,332.72 P1_DHT1.1
  BOTTOM w0.254: P1_U3.1 54.02,317.02 54.66,317.02 ; P1_DHT1.1 62.73,332.72 62.73,317.02 54.66,317.02 ; 96.56,316.85 96.32,316.85 96.32,289.66 85.14,289.66 P1_NM2.3 ; 96.56,316.85 P1_SD1.1 ; 96.56,316.85 P1_MS1.01 ; P1_U2.3 54.66,314.69 ; 54.66,314.69 54.66,317.02 ; 54.66,314.69 44.04,314.69 44.04,311.13 P1_U1.20
P1_N43205: length 101.6
  TOP w0.254: P1_U1.9 36.42,311.13 36.42,315.12 33.52,315.12 33.52,320.25 v1(73.7,320.25) 100.84,320.25 v1(100.84,305.42)
  BOTTOM w0.254: P1_C3.1 v1(100.84,305.42) ; P1_CLK2.2 v1(73.7,320.25)
P1_N43213: length 46.9
  TOP w0.254: P1_DHT1.4 81.6,325.1 81.6,331.45 P1_U1.28
P1_N43273: length 38.7
  TOP w0.254: P1_U1.27 80.06,328.91 P1_DHT1.2
P1_N43289: length 58.1
  BOTTOM w0.254: P1_DHT1.3 89.16,327.64 89.16,312.82 93.45,312.82 93.45,294.16 85.83,294.16 P1_NM2.1
P1_N43297: length 60
  TOP w0.254: P1_MS1.03 41.14,334.62 41.14,326.37 P1_U1.26
P1_N43349: length 102.4
  TOP w0.254: P1_U1.25 101.48,323.83 101.48,293.06 v1(90.93,293.06)
  BOTTOM w0.254: v1(90.93,293.06) 91.56,293.06 91.56,293.23 92.12,293.23 P1_NM3.3
P1_N43399: length 47.4
  TOP w0.254: P1_U1.23 42.59,319.74 66.19,319.74 66.19,313.96 v1(78.75,313.96)
  BOTTOM w0.254: P1_R1.2 78.75,310.5 v1(78.75,313.96)
P1_N43483: length 76.5
  TOP w0.254: v1(73.7,302.06) v1(100.67,302.06) ; P1_U1.10 34.97,307.6 70.62,307.6 v1(70.62,308.82)
  BOTTOM w0.254: v1(100.67,302.06) 100.67,300.97 P1_C2.1 ; v1(73.7,302.06) P1_CLK2.1 73.7,308.82 v1(70.62,308.82)
P1_N43487: length 52.9
  TOP w0.254: v1(69.81,316.73) 78.57,316.73 78.57,317.87 85.14,317.87 85.14,316.85 ; P1_U1.19 v1(69.81,308.59)
  BOTTOM w0.254: v1(69.81,308.59) v1(69.81,316.73)
P1_N43499: length 63
  TOP w0.254: P1_U1.18 42.59,307.04 89.16,307.04 89.16,317.87 92.75,317.87 P1_SD1.3
P1_N43549: length 49
  BOTTOM w0.254: P1_U3.3 59.1,322.28 33.98,322.28 33.98,303.51 P1_U1.12
P1_N43557: length 61
  TOP w0.254: P1_U1.17 90.22,303.51 90.22,316.85
P1_N43597: length 56.9
  BOTTOM w0.254: P1_U3.4 61.64,322.74 33.06,322.74 33.06,300.97 P1_U1.13
P1_N43605: length 61
  TOP w0.254: P1_U1.16 v1(87.67,300.97)
  BOTTOM w0.254: P1_SD1.5 v1(87.67,300.97)
P1_N43613: length 45.3
  BOTTOM w0.254: P1_MS1.02 94.03,292.35 92.82,292.35 P1_NM3.1
P1_N43625: length 67.7
  TOP w0.254: P1_U3.5 64.18,310.09 25.56,310.09 25.56,298.43 P1_U1.14
P1_N43633: length 58.4
  TOP w0.254: P1_SD1.7 82.59,309.45 v1(43.58,309.45)
  BOTTOM w0.254: v1(43.58,309.45) 43.58,298.43 P1_U1.15
P1_N435731: length 68
  TOP w0.254: P1_D1.2 59.11,289.54 59.11,298.71 v1(84.21,298.71)
  BOTTOM w0.254: v1(84.21,298.71) 84.21,310.5 P1_R1.1
P1_SOL+: length 119.4
  TOP w0.254: v1(92.82,295.89) 85.86,295.89 85.86,299.98 52.99,299.98 52.99,299.7 P1_K1.1 50.84,294.62 P1_J2.1
  BOTTOM w0.254: P1_K1.1 54.99,299.7 54.99,310.11 P1_U2.1 ; P1_B2.1 25.1,317.48 25.1,294.62 P1_J2.1 ; P1_R7.1 v1(92.82,295.89)
P1_SOL-: length 68.8
  TOP w0.254: v1(67.7,299.34) 56.37,299.34 56.37,292.08 P1_J2.2
  BOTTOM w0.254: P1_NM1.1 79.48,291.43 67.7,291.43 v1(67.7,299.34)
P2_GND: length 255.8
  TOP w0.254: v1(174.44,291.41) 180.69,291.41 180.69,291.61 v1(181.32,291.61) ; P2_U3.2 146.56,316.21 145.93,316.21 ; 145.93,316.21 P2_U1.22 130.99,316.21 130.99,318.75 P2_U1.6 ; 145.93,316.21 v1(145.93,312.4) ; v1(188.18,307.6) 188.18,313.24 185.29,313.24 P2_SD1.2 185.29,318.42 v1(167.02,318.42) v1(157.34,318.42) ; P2_B2.2 116.72,313.67 P2_U1.8 ; v1(187.67,299.4) v1(182.51,299.4) ; P2_D1.1 v1(125.96,289.54)
  BOTTOM w0.254: v1(181.32,291.61) 181.32,290.55 P2_NM3.2 ; P2_NM2.2 v1(174.44,291.41) 170.04,291.41 ; P2_R4.1 172.91,298.07 ; 172.91,298.07 182.51,298.07 v1(182.51,299.4) 182.64,299.4 182.64,300.33 P2_R5.1 ; 172.91,298.07 170.17,298.07 170.17,295.89 ; v1(157.34,318.42) 157.34,312.4 P2_U2.2 v1(145.93,312.4) 142.84,312.4 P2_K1.5 ; 117.87,314.94 117.87,303.51 P2_J3.2 ; 117.87,314.94 P2_B2.2 ; 117.87,314.94 117.87,326.37 P2_B1.2 ; 125.96,313.67 125.96,318.75 P2_U1.6 ; 125.96,313.67 P2_U1.8 ; 125.96,313.67 125.96,306.05 ; 170.04,291.41 170.04,294.89 ; 170.04,291.41 170.04,289.66 168.09,289.66 P2_NM1.2 ; 170.17,295.89 170.04,295.89 170.04,294.89 ; 170.17,295.89 P2_R8.2 ; 170.04,294.89 162.73,294.89 162.73,295.89 P2_RTHERM.2 ; 187.54,300.97 187.54,305.42 ; 187.54,300.97 187.54,300.49 187.67,300.49 v1(187.67,299.4) 190.67,299.4 190.67,295.89 P2_C1.1 ; 187.54,300.97 P2_C2.2 ; 187.54,305.42 187.54,307.6 v1(188.18,307.6) 190.67,307.6 190.67,309.86 P2_C4.1 ; 187.54,305.42 P2_C3.2 ; v1(167.02,318.42) 167.02,322.56 P2_U4.4 ; 125.96,306.05 P2_U1.11 ; 125.96,306.05 v1(125.96,289.54)
P2_N38120: length 120.2
  TOP w0.254: 162.68,325.38 163.12,325.38 v1(163.12,326.37) ; 162.68,325.38 121.07,325.38 121.07,328.91 P2_B1.1 ; 162.68,325.38 v1(162.68,324.46) ; v1(187.09,309.86) 187.09,302.88 v1(166.77,302.88)
  BOTTOM w0.254: 166.77,303.95 171.64,303.95 P2_R2.1 ; 166.77,303.95 v1(166.77,302.88) 166.77,300.33 P2_R6.1 ; 166.77,303.95 165.2,303.95 165.2,320.88 162.68,320.88 162.68,323.83 ; 162.68,323.83 v1(162.68,324.46) ; 162.68,323.83 P2_U4.6 ; P2_C4.2 v1(187.09,309.86) ; P2_U4.1 v1(163.12,326.37)
P2_N38132: length 89.4
  TOP w0.254: v1(157.06,305.42) v1(167.02,305.42)
  BOTTOM w0.254: P2_U4.7 163.76,325.1 163.76,321.34 166.38,321.34 166.38,305.42 v1(167.02,305.42) P2_R2.2 ; P2_NM4.1 189.17,288.74 157.06,288.74 v1(157.06,305.42)
P2_N38170: length 82.4
  TOP w0.254: v1(187.77,293.7) P2_K1.3
  BOTTOM w0.254: P2_K1.3 152.91,293.7 152.91,307.85 157.98,307.85 157.98,326.37 P2_U4.8 ; P2_NM4.2 v1(187.77,293.7) 187.13,293.7 187.13,295.89 P2_C1.2
P2_N38194: length 24
  TOP w0.254: v1(188.47,294.65) 188.47,300.97 v1(178.49,300.97)
  BOTTOM w0.254: P2_NM4.3 v1(188.47,294.65) ; v1(178.49,300.97) 178.49,301.61 178.42,301.61 178.42,305.42 P2_R3.2
P2_N38286: length 49.3
  BOTTOM w0.254: P2_U4.5 159.29,322.56 159.29,325.71 167.77,325.71 167.77,326.19 178.7,326.19 178.7,309.16 182.01,309.16 182.01,305.42 P2_R3.1
P2_N38318: length 37.9
  BOTTOM w0.254: P2_U4.3 176.62,323.83 176.62,300.33 P2_R5.2
P2_N38338: length 52
  BOTTOM w0.254: P2_RTHERM.1 166.77,295.89 166.77,298.99 ; P2_R6.2 163.18,300.33 163.18,298.99 166.77,298.99 ; 166.77,298.99 170.17,298.99 170.17,300.33 ; P2_U4.2 164.21,325.1 164.21,323.17 168.11,323.17 168.11,307.79 172.48,307.79 172.48,301.8 170.17,301.8 170.17,300.33 ; 170.17,300.33 P2_R4.2
P2_N38498: length 40.2
  TOP w0.254: P2_J3.1 116.72,304.67 137.7,304.67 137.7,304.47 154.14,304.47 P2_K1.4
P2_N38548: length 45.5
  BOTTOM w0.254: P2_U1.5 129.16,321.29 129.16,293.7 P2_K1.2
P2_N38656: length 118
  TOP w0.127: v1(173.85,295.89) 151.08,295.89 151.08,288.6 115.17,288.6 115.17,323.83 P2_U1.4
  BOTTOM w0.127: P2_R8.1 v1(173.85,295.89) P2_R7.2
P2_N42817: length 65.1
  TOP w0.254: P2_U1.24 v1(158.71,321.29)
  BOTTOM w0.254: v1(158.71,321.29) 158.71,293.69 168.78,293.69 P2_NM1.3
P2_N42837: length 154.7
  TOP w0.254: P2_MS1.01 186.56,332.72 P2_DHT1.1 ; P2_U1.7 128.25,316.21 128.25,311.13 P2_U1.20
  BOTTOM w0.254: 144.66,314.69 134.04,314.69 134.04,311.13 P2_U1.20 ; 144.66,314.69 P2_U2.3 ; 144.66,314.69 144.66,317.02 ; 144.66,317.02 152.73,317.02 152.73,332.72 P2_DHT1.1 ; 144.66,317.02 144.02,317.02 P2_U3.1 ; 187.84,316.85 186.56,316.85 ; 186.56,316.85 P2_MS1.01 ; 186.56,316.85 186.32,316.85 186.32,289.66 175.13,289.66 P2_NM2.3
P2_N43205: length 101.6
  TOP w0.254: v1(190.84,305.42) 190.84,320.25 v1(163.71,320.25) 123.52,320.25 123.52,315.12 126.42,315.12 126.42,311.13 P2_U1.9
  BOTTOM w0.254: P2_C3.1 v1(190.84,305.42) ; P2_CLK2.2 v1(163.71,320.25)
P2_N43213: length 46.9
  TOP w0.254: P2_U1.28 171.6,331.45 171.6,325.1 P2_DHT1.4
P2_N43273: length 38.7
  TOP w0.254: P2_DHT1.2 170.06,328.91 P2_U1.27
P2_N43289: length 58.1
  BOTTOM w0.254: P2_DHT1.3 179.16,327.64 179.16,312.82 183.45,312.82 183.45,294.16 175.84,294.16 175.84,290.55
P2_N43297: length 60
  TOP w0.254: P2_U1.26 131.14,326.37 131.14,334.62 P2_MS1.03
P2_N43349: length 102.4
  TOP w0.254: P2_U1.25 191.48,323.83 191.48,293.06 v1(180.93,293.06)
  BOTTOM w0.254: v1(180.93,293.06) 181.56,293.06 181.56,293.23 182.12,293.23 P2_NM3.3
P2_N43399: length 47.4
  TOP w0.254: v1(168.75,313.96) 156.19,313.96 156.19,319.74 132.59,319.74 P2_U1.23
  BOTTOM w0.254: P2_R1.2 168.75,310.5 v1(168.75,313.96)
P2_N43483: length 76.5
  TOP w0.254: P2_U1.10 124.97,307.6 160.62,307.6 v1(160.62,308.82) ; v1(163.71,302.06) v1(190.67,302.06)
  BOTTOM w0.254: P2_C2.1 190.67,300.97 v1(190.67,302.06) ; v1(163.71,302.06) P2_CLK2.1 163.71,308.82 v1(160.62,308.82)
P2_N43487: length 52.9
  TOP w0.254: v1(159.81,316.73) 168.57,316.73 168.57,317.87 175.13,317.87 P2_SD1.6 ; P2_U1.19 v1(159.81,308.59)
  BOTTOM w0.254: v1(159.81,308.59) v1(159.81,316.73)
P2_N43499: length 63
  TOP w0.254: P2_SD1.3 182.75,317.87 179.16,317.87 179.16,307.04 132.59,307.04 P2_U1.18
P2_N43549: length 49
  BOTTOM w0.254: P2_U1.12 123.98,303.51 123.98,322.28 149.1,322.28 P2_U3.3
P2_N43557: length 61
  TOP w0.254: P2_U1.17 180.22,303.51 P2_SD1.4
P2_N43597: length 56.9
  BOTTOM w0.254: P2_U1.13 123.06,300.97 123.06,322.74 151.64,322.74 P2_U3.4
P2_N43605: length 61
  TOP w0.254: P2_U1.16 v1(177.68,300.97)
  BOTTOM w0.254: 177.68,316.85 v1(177.68,300.97)
P2_N43613: length 45.3
  BOTTOM w0.254: P2_MS1.02 184.03,292.35 182.82,292.35 P2_NM3.1
P2_N43625: length 67.7
  TOP w0.254: P2_U1.14 115.56,298.43 115.56,310.09 154.18,310.09 P2_U3.5
P2_N43633: length 58.4
  TOP w0.254: v1(133.58,309.45) 172.59,309.45 P2_SD1.7
  BOTTOM w0.254: P2_U1.15 133.58,298.43 v1(133.58,309.45)
P2_N435731: length 68
  TOP w0.254: v1(174.21,298.71) 149.11,298.71 149.11,289.54 P2_D1.2
  BOTTOM w0.254: v1(174.21,298.71) 174.21,310.5 P2_R1.1
P2_SOL+: length 119.4
  TOP w0.254: P2_J2.1 140.84,294.62 P2_K1.1 142.99,299.7 142.99,299.98 175.86,299.98 175.86,295.89 v1(182.82,295.89)
  BOTTOM w0.254: P2_K1.1 144.99,299.7 144.99,310.11 P2_U2.1 ; P2_R7.1 v1(182.82,295.89) ; P2_J2.1 115.1,294.62 115.1,317.48 P2_B2.1
P2_SOL-: length 68.8
  TOP w0.254: v1(157.7,299.34) 146.37,299.34 146.37,292.08 P2_J2.2
  BOTTOM w0.254: P2_NM1.1 169.49,291.43 157.7,291.43 v1(157.7,299.34)
P3_GND: length 255.8
  TOP w0.254: v1(55.92,372.4) 55.92,376.21 ; 55.92,376.21 56.56,376.21 P3_U3.2 ; 55.92,376.21 P3_U1.22 40.99,376.21 40.99,378.75 P3_U1.6 ; v1(98.18,367.6) 98.18,373.24 95.3,373.24 95.3,378.42 v1(77.02,378.42) v1(67.34,378.42) ; v1(84.44,351.41) 90.69,351.41 90.69,351.61 v1(91.32,351.61) ; P3_B2.2 26.71,373.67 P3_U1.8 ; v1(97.67,359.4) v1(92.51,359.4) ; P3_D1.1 v1(35.96,349.54)
  BOTTOM w0.254: 80.04,354.89 72.73,354.89 72.73,355.89 P3_RTHERM.2 ; 80.04,354.89 80.04,355.89 80.17,355.89 ; 80.04,354.89 80.04,351.41 ; 80.17,355.89 P3_R8.2 ; 80.17,355.89 80.17,358.07 82.91,358.07 ; P3_U1.6 35.96,378.75 35.96,373.67 ; 35.96,366.05 P3_U1.11 ; 35.96,366.05 v1(35.96,349.54) ; 35.96,366.05 35.96,373.67 ; v1(91.32,351.61) 91.32,350.55 P3_NM3.2 ; 35.96,373.67 P3_U1.8 ; P3_NM2.2 v1(84.44,351.41) 80.04,351.41 ; P3_R5.1 92.64,360.33 92.64,359.4 v1(92.51,359.4) 92.51,358.07 82.91,358.07 ; 82.91,358.07 P3_R4.1 ; 97.54,360.97 97.54,365.42 ; 97.54,360.97 P3_C2.2 ; 97.54,360.97 97.54,360.49 97.67,360.49 v1(97.67,359.4) 100.67,359.4 100.67,355.89 P3_C1.1 ; 97.54,365.42 97.54,367.6 v1(98.18,367.6) 100.67,367.6 100.67,369.86 P3_C4.1 ; 97.54,365.42 P3_C3.2 ; P3_B2.2 27.87,374.94 ; 27.87,374.94 27.87,386.37 P3_B1.2 ; 27.87,374.94 27.87,363.51 P3_J3.2 ; 80.04,351.41 80.04,349.66 78.08,349.66 P3_NM1.2 ; P3_U4.4 77.02,382.56 v1(77.02,378.42) ; P3_K1.5 52.84,372.4 v1(55.92,372.4) P3_U2.2 67.34,372.4 v1(67.34,378.42)
P3_N38120: length 120.2
  TOP w0.254: P3_B1.1 31.07,388.91 31.07,385.38 72.68,385.38 ; v1(72.68,384.46) 72.68,385.38 ; 72.68,385.38 73.12,385.38 v1(73.12,386.37) ; v1(97.09,369.86) 97.09,362.88 v1(76.77,362.88)
  BOTTOM w0.254: v1(72.68,384.46) 72.68,383.83 ; 72.68,383.83 P3_U4.6 ; 72.68,383.83 72.68,380.88 75.2,380.88 75.2,363.95 76.77,363.95 ; P3_R6.1 76.77,360.33 v1(76.77,362.88) 76.77,363.95 ; P3_R2.1 81.64,363.95 76.77,363.95 ; P3_U4.1 v1(73.12,386.37) ; P3_C4.2 v1(97.09,369.86)
P3_N38132: length 89.4
  TOP w0.254: v1(67.06,365.42) v1(77.02,365.42)
  BOTTOM w0.254: P3_R2.2 v1(77.02,365.42) 76.38,365.42 76.38,381.34 73.76,381.34 73.76,385.1 P3_U4.7 ; v1(67.06,365.42) 67.06,348.74 99.17,348.74 P3_NM4.1
P3_N38170: length 82.4
  TOP w0.254: v1(97.77,353.7) P3_K1.3
  BOTTOM w0.254: P3_U4.8 67.98,386.37 67.98,367.85 62.91,367.85 62.91,353.7 P3_K1.3 ; P3_C1.2 97.14,355.89 97.14,353.7 v1(97.77,353.7) P3_NM4.2
P3_N38194: length 24
  TOP w0.254: v1(98.47,354.65) 98.47,360.97 v1(88.49,360.97)
  BOTTOM w0.254: v1(88.49,360.97) 88.49,361.61 88.42,361.61 88.42,365.42 P3_R3.2 ; P3_NM4.3 v1(98.47,354.65)
P3_N38286: length 49.3
  BOTTOM w0.254: P3_U4.5 69.29,382.56 69.29,385.71 77.77,385.71 77.77,386.19 88.7,386.19 88.7,369.16 92.01,369.16 92.01,365.42 P3_R3.1
P3_N38318: length 37.9
  BOTTOM w0.254: P3_U4.3 86.62,383.83 86.62,360.33 P3_R5.2
P3_N38338: length 52
  BOTTOM w0.254: 76.77,358.99 73.18,358.99 73.18,360.33 P3_R6.2 ; 76.77,358.99 80.17,358.99 80.17,360.33 ; 76.77,358.99 76.77,355.89 P3_RTHERM.1 ; 80.17,360.33 80.17,361.8 82.48,361.8 82.48,367.79 78.11,367.79 78.11,383.17 74.21,383.17 74.21,385.1 P3_U4.2 ; 80.17,360.33 P3_R4.2
P3_N38498: length 40.2
  TOP w0.254: P3_J3.1 26.71,364.67 47.7,364.67 47.7,364.47 64.14,364.47 P3_K1.4
P3_N38548: length 45.5
  BOTTOM w0.254: P3_K1.2 39.16,353.7 39.16,381.29 P3_U1.5
P3_N38656: length 118
  TOP w0.127: P3_U1.4 25.17,383.83 25.17,348.6 61.08,348.6 61.08,355.89 v1(83.85,355.89)
  BOTTOM w0.127: P3_R7.2 v1(83.85,355.89) P3_R8.1
P3_N42817: length 65.1
  TOP w0.254: P3_U1.24 v1(68.71,381.29)
  BOTTOM w0.254: P3_NM1.3 78.78,353.69 68.71,353.69 v1(68.71,381.29)
P3_N42837: length 154.7
  TOP w0.254: P3_U1.20 38.25,371.13 38.25,376.21 P3_U1.7 ; P3_MS1.01 96.56,392.72 P3_DHT1.1
  BOTTOM w0.254: P3_U1.20 44.04,371.13 44.04,374.69 54.66,374.69 ; P3_DHT1.1 62.73,392.72 62.73,377.02 54.66,377.02 ; P3_U2.3 54.66,374.69 ; 54.66,374.69 54.66,377.02 ; P3_MS1.01 96.56,376.85 ; 96.56,376.85 96.32,376.85 96.32,349.66 85.14,349.66 P3_NM2.3 ; 96.56,376.85 P3_SD1.1 ; 54.66,377.02 54.02,377.02 P3_U3.1
P3_N43205: length 101.6
  TOP w0.254: P3_U1.9 36.42,371.13 36.42,375.12 33.52,375.12 33.52,380.25 v1(73.7,380.25) 100.84,380.25 v1(100.84,365.42)
  BOTTOM w0.254: P3_C3.1 v1(100.84,365.42) ; P3_CLK2.2 v1(73.7,380.25)
P3_N43213: length 46.9
  TOP w0.254: P3_DHT1.4 81.6,385.1 81.6,391.45 P3_U1.28
P3_N43273: length 38.7
  TOP w0.254: P3_U1.27 80.06,388.91 P3_DHT1.2
P3_N43289: length 58.1
  BOTTOM w0.254: P3_NM2.1 85.83,354.16 93.45,354.16 93.45,372.82 89.16,372.82 89.16,387.64 P3_DHT1.3
P3_N43297: length 60
  TOP w0.254: P3_U1.26 41.14,386.37 41.14,394.62 P3_MS1.03
P3_N43349: length 102.4
  TOP w0.254: P3_U1.25 101.48,383.83 101.48,353.06 v1(90.93,353.06)
  BOTTOM w0.254: v1(90.93,353.06) 91.56,353.06 91.56,353.23 92.12,353.23 P3_NM3.3
P3_N43399: length 47.4
  TOP w0.254: P3_U1.23 42.59,379.74 66.19,379.74 66.19,373.96 v1(78.75,373.96)
  BOTTOM w0.254: P3_R1.2 78.75,370.5 v1(78.75,373.96)
P3_N43483: length 76.5
  TOP w0.254: v1(73.7,362.06) v1(100.67,362.06) ; P3_U1.10 34.97,367.6 70.62,367.6 v1(70.62,368.82)
  BOTTOM w0.254: v1(73.7,362.06) P3_CLK2.1 73.7,368.82 v1(70.62,368.82) ; P3_C2.1 100.67,360.97 v1(100.67,362.06)
P3_N43487: length 52.9
  TOP w0.254: 85.14,376.85 85.14,377.87 78.57,377.87 78.57,376.73 v1(69.81,376.73) ; P3_U1.19 v1(69.81,368.59)
  BOTTOM w0.254: v1(69.81,368.59) v1(69.81,376.73)
P3_N43499: length 63
  TOP w0.254: P3_SD1.3 92.75,377.87 89.16,377.87 89.16,367.04 42.59,367.04 P3_U1.18
P3_N43549: length 49
  BOTTOM w0.254: P3_U1.12 33.98,363.51 33.98,382.28 59.1,382.28 P3_U3.3
P3_N43557: length 61
  TOP w0.254: 90.22,376.85 90.22,363.51 P3_U1.17
P3_N43597: length 56.9
  BOTTOM w0.254: P3_U3.4 61.64,382.74 33.06,382.74 33.06,360.97 P3_U1.13
P3_N43605: length 61
  TOP w0.254: P3_U1.16 v1(87.67,360.97)
  BOTTOM w0.254: P3_SD1.5 v1(87.67,360.97)
P3_N43613: length 45.3
  BOTTOM w0.254: P3_MS1.02 94.03,352.35 92.82,352.35 P3_NM3.1
P3_N43625: length 67.7
  TOP w0.254: P3_U3.5 64.18,370.09 25.56,370.09 25.56,358.43 P3_U1.14
P3_N43633: length 58.4
  TOP w0.254: P3_SD1.7 82.59,369.45 v1(43.58,369.45)
  BOTTOM w0.254: v1(43.58,369.45) 43.58,358.43 P3_U1.15
P3_N435731: length 68
  TOP w0.254: v1(84.21,358.71) 59.11,358.71 59.11,349.54 P3_D1.2
  BOTTOM w0.254: P3_R1.1 84.21,370.5 v1(84.21,358.71)
P3_SOL+: length 119.4
  TOP w0.254: P3_J2.1 50.84,354.62 P3_K1.1 52.99,359.7 52.99,359.98 85.86,359.98 85.86,355.89 v1(92.82,355.89)
  BOTTOM w0.254: P3_B2.1 25.1,377.48 25.1,354.62 P3_J2.1 ; P3_R7.1 v1(92.82,355.89) ; P3_U2.1 54.99,370.11 54.99,359.7 P3_K1.1
P3_SOL-: length 68.8
  TOP w0.254: v1(67.7,359.34) 56.37,359.34 56.37,352.08 P3_J2.2
  BOTTOM w0.254: v1(67.7,359.34) 67.7,351.43 79.48,351.43 P3_NM1.1
P4_GND: length 255.8
  TOP w0.254: P4_B2.2 116.72,373.67 P4_U1.8 ; v1(188.18,367.6) 188.18,373.24 185.29,373.24 P4_SD1.2 185.29,378.42 v1(167.02,378.42) v1(157.34,378.42) ; P4_U1.6 130.99,378.75 130.99,376.21 P4_U1.22 145.93,376.21 ; v1(174.44,351.41) 180.69,351.41 180.69,351.61 v1(181.32,351.61) ; v1(145.93,372.4) 145.93,376.21 ; 145.93,376.21 146.56,376.21 P4_U3.2 ; P4_D1.1 v1(125.96,349.54) ; v1(187.67,359.4) v1(182.51,359.4)
  BOTTOM w0.254: P4_C1.1 190.67,355.89 190.67,359.4 v1(187.67,359.4) 187.67,360.49 187.54,360.49 187.54,360.97 ; P4_C4.1 190.67,369.86 190.67,367.6 v1(188.18,367.6) 187.54,367.6 187.54,365.42 ; 170.04,354.89 170.04,351.41 ; 170.04,354.89 170.04,355.89 170.17,355.89 ; 170.04,354.89 162.73,354.89 162.73,355.89 P4_RTHERM.2 ; 170.04,351.41 v1(174.44,351.41) P4_NM2.2 ; 170.04,351.41 170.04,349.66 168.09,349.66 P4_NM1.2 ; P4_B2.2 117.87,374.94 ; 117.87,374.94 117.87,386.37 P4_B1.2 ; 117.87,374.94 117.87,363.51 P4_J3.2 ; 187.54,365.42 P4_C3.2 ; 187.54,365.42 187.54,360.97 ; v1(181.32,351.61) 181.32,350.55 P4_NM3.2 ; 125.96,373.67 125.96,366.05 ; 125.96,373.67 P4_U1.8 ; 125.96,373.67 125.96,378.75 P4_U1.6 ; 125.96,366.05 v1(125.96,349.54) ; 125.96,366.05 P4_U1.11 ; P4_R8.2 170.17,355.89 ; 170.17,355.89 170.17,358.07 172.91,358.07 ; P4_R5.1 182.64,360.33 182.64,359.4 v1(182.51,359.4) 182.51,358.07 172.91,358.07 ; 172.91,358.07 P4_R4.1 ; P4_K1.5 142.84,372.4 v1(145.93,372.4) P4_U2.2 157.34,372.4 v1(157.34,378.42) ; P4_U4.4 167.02,382.56 v1(167.02,378.42) ; P4_C2.2 187.54,360.97
P4_N38120: length 120.2
  TOP w0.254: v1(162.68,384.46) 162.68,385.38 ; 162.68,385.38 121.07,385.38 121.07,388.91 P4_B1.1 ; 162.68,385.38 163.12,385.38 v1(163.12,386.37) ; v1(187.09,369.86) 187.09,362.88 v1(166.77,362.88)
  BOTTOM w0.254: 162.68,383.83 162.68,380.88 165.2,380.88 165.2,363.95 166.77,363.95 ; 162.68,383.83 P4_U4.6 ; 162.68,383.83 v1(162.68,384.46) ; P4_R6.1 166.77,360.33 v1(166.77,362.88) 166.77,363.95 ; 166.77,363.95 171.64,363.95 P4_R2.1 ; P4_C4.2 v1(187.09,369.86) ; P4_U4.1 v1(163.12,386.37)
P4_N38132: length 89.4
  TOP w0.254: v1(157.06,365.42) v1(167.02,365.42)
  BOTTOM w0.254: P4_NM4.1 189.17,348.74 157.06,348.74 v1(157.06,365.42) ; P4_R2.2 v1(167.02,365.42) 166.38,365.42 166.38,381.34 163.76,381.34 163.76,385.1 P4_U4.7
P4_N38170: length 82.4
  TOP w0.254: v1(187.77,353.7) P4_K1.3
  BOTTOM w0.254: P4_C1.2 187.13,355.89 187.13,353.7 v1(187.77,353.7) P4_NM4.2 ; P4_K1.3 152.91,353.7 152.91,367.85 157.98,367.85 157.98,386.37 P4_U4.8
P4_N38194: length 24
  TOP w0.254: v1(178.49,360.97) 188.47,360.97 v1(188.47,354.65)
  BOTTOM w0.254: P4_NM4.3 v1(188.47,354.65) ; v1(178.49,360.97) 178.49,361.61 178.42,361.61 178.42,365.42 P4_R3.2
P4_N38286: length 49.3
  BOTTOM w0.254: P4_U4.5 159.29,382.56 159.29,385.71 167.77,385.71 167.77,386.19 178.7,386.19 178.7,369.16 182.01,369.16 182.01,365.42 P4_R3.1
P4_N38318: length 37.9
  BOTTOM w0.254: P4_R5.2 176.62,360.33 176.62,383.83 P4_U4.3
P4_N38338: length 52
  BOTTOM w0.254: 170.17,360.33 170.17,361.8 172.48,361.8 172.48,367.79 168.11,367.79 168.11,383.17 164.21,383.17 164.21,385.1 P4_U4.2 ; 170.17,360.33 P4_R4.2 ; 170.17,360.33 170.17,358.99 166.77,358.99 ; 166.77,358.99 166.77,355.89 P4_RTHERM.1 ; 166.77,358.99 163.18,358.99 163.18,360.33 P4_R6.2
P4_N38498: length 40.2
  TOP w0.254: P4_J3.1 116.72,364.67 137.7,364.67 137.7,364.47 154.14,364.47 P4_K1.4
P4_N38548: length 45.5
  BOTTOM w0.254: P4_U1.5 129.16,381.29 129.16,353.7 P4_K1.2
P4_N38656: length 118
  TOP w0.127: P4_U1.4 115.17,383.83 115.17,348.6 151.08,348.6 151.08,355.89 v1(173.85,355.89)
  BOTTOM w0.127: P4_R7.2 v1(173.85,355.89) P4_R8.1
P4_N42817: length 65.1
  TOP w0.254: P4_U1.24 v1(158.71,381.29)
  BOTTOM w0.254: P4_NM1.3 168.78,353.69 158.71,353.69 v1(158.71,381.29)
P4_N42837: length 154.7
  TOP w0.254: P4_U1.7 128.25,376.21 128.25,371.13 P4_U1.20 ; P4_DHT1.1 186.56,392.72 P4_MS1.01
  BOTTOM w0.254: P4_U2.3 144.66,374.69 ; 144.66,374.69 134.04,374.69 134.04,371.13 P4_U1.20 ; 144.66,374.69 144.66,377.02 ; 144.66,377.02 152.73,377.02 152.73,392.72 P4_DHT1.1 ; 144.66,377.02 144.02,377.02 P4_U3.1 ; 186.56,376.85 186.32,376.85 186.32,349.66 175.13,349.66 P4_NM2.3 ; 186.56,376.85 187.84,376.85 ; 186.56,376.85 P4_MS1.01
P4_N43205: length 101.6
  TOP w0.254: v1(190.84,365.42) 190.84,380.25 v1(163.71,380.25) 123.52,380.25 123.52,375.12 126.42,375.12 126.42,371.13 P4_U1.9
  BOTTOM w0.254: P4_C3.1 v1(190.84,365.42) ; P4_CLK2.2 v1(163.71,380.25)
P4_N43213: length 46.9
  TOP w0.254: P4_DHT1.4 171.6,385.1 171.6,391.45 P4_U1.28
P4_N43273: length 38.7
  TOP w0.254: P4_U1.27 170.06,388.91 P4_DHT1.2
P4_N43289: length 58.1
  BOTTOM w0.254: 175.84,350.55 175.84,354.16 183.45,354.16 183.45,372.82 179.16,372.82 179.16,387.64 P4_DHT1.3
P4_N43297: length 60
  TOP w0.254: P4_MS1.03 131.14,394.62 131.14,386.37 P4_U1.26
P4_N43349: length 102.4
  TOP w0.254: P4_U1.25 191.48,383.83 191.48,353.06 v1(180.93,353.06)
  BOTTOM w0.254: v1(180.93,353.06) 181.56,353.06 181.56,353.23 182.12,353.23 P4_NM3.3
P4_N43399: length 47.4
  TOP w0.254: v1(168.75,373.96) 156.19,373.96 156.19,379.74 132.59,379.74 P4_U1.23
  BOTTOM w0.254: P4_R1.2 168.75,370.5 v1(168.75,373.96)
P4_N43483: length 76.5
  TOP w0.254: v1(160.62,368.82) 160.62,367.6 124.97,367.6 P4_U1.10 ; v1(163.71,362.06) v1(190.67,362.06)
  BOTTOM w0.254: v1(190.67,362.06) 190.67,360.97 P4_C2.1 ; v1(160.62,368.82) 163.71,368.82 P4_CLK2.1 v1(163.71,362.06)
P4_N43487: length 52.9
  TOP w0.254: P4_U1.19 v1(159.81,368.59) ; P4_SD1.6 175.13,377.87 168.57,377.87 168.57,376.73 v1(159.81,376.73)
  BOTTOM w0.254: v1(159.81,368.59) v1(159.81,376.73)
P4_N43499: length 63
  TOP w0.254: P4_U1.18 132.59,367.04 179.16,367.04 179.16,377.87 182.75,377.87 P4_SD1.3
P4_N43549: length 49
  BOTTOM w0.254: P4_U1.12 123.98,363.51 123.98,382.28 149.1,382.28 P4_U3.3
P4_N43557: length 61
  TOP w0.254: P4_SD1.4 180.22,363.51 P4_U1.17
P4_N43597: length 56.9
  BOTTOM w0.254: P4_U3.4 151.64,382.74 123.06,382.74 123.06,360.97 P4_U1.13
P4_N43605: length 61
  TOP w0.254: P4_U1.16 v1(177.68,360.97)
  BOTTOM w0.254: 177.68,376.85 v1(177.68,360.97)
P4_N43613: length 45.3
  BOTTOM w0.254: P4_MS1.02 184.03,352.35 182.82,352.35 P4_NM3.1
P4_N43625: length 67.7
  TOP w0.254: P4_U3.5 154.18,370.09 115.56,370.09 115.56,358.43 P4_U1.14
P4_N43633: length 58.4
  TOP w0.254: P4_SD1.7 172.59,369.45 v1(133.58,369.45)
  BOTTOM w0.254: P4_U1.15 133.58,358.43 v1(133.58,369.45)
P4_N435731: length 68
  TOP w0.254: v1(174.21,358.71) 149.11,358.71 149.11,349.54 P4_D1.2
  BOTTOM w0.254: v1(174.21,358.71) 174.21,370.5 P4_R1.1
P4_SOL+: length 119.4
  TOP w0.254: v1(182.82,355.89) 175.86,355.89 175.86,359.98 142.99,359.98 142.99,359.7 P4_K1.1 140.84,354.62 P4_J2.1
  BOTTOM w0.254: P4_R7.1 v1(182.82,355.89) ; P4_U2.1 144.99,370.11 144.99,359.7 P4_K1.1 ; P4_B2.1 115.1,377.48 115.1,354.62 P4_J2.1
P4_SOL-: length 68.8
  TOP w0.254: P4_J2.2 146.37,352.08 146.37,359.34 v1(157.7,359.34)
  BOTTOM w0.254: P4_NM1.1 169.49,351.43 157.7,351.43 v1(157.7,359.34)

## Copper pours and planes (outline as drawn; the poured copper is in the pictures)
Net_154 on BOTTOM (solid shape): outline of 237 points within 1,1 319,186
Net_155 on BOTTOM (solid shape): outline of 358 points within 1,244 319,429
Net_156 on TOP (solid shape): outline of 237 points within 1,1 319,186
Net_157 on TOP (solid shape): outline of 358 points within 1,244 319,429
Net_158 on TOP (solid shape): 20,410.01 19.99,410 13.6,410 15.47,414.53 20,416.4
Net_159 on TOP (solid shape): 26.4,410 24.53,405.47 20,403.6 20,409.99 20.01,410
Net_160 on TOP (solid shape): 300,410.01 299.99,410 293.6,410 295.47,414.53 300,416.4
Net_161 on TOP (solid shape): 306.4,410 304.53,405.47 300,403.6 300,409.99 300.01,410
Net_162 on TOP (solid shape): 300,20.01 299.99,20 293.6,20 295.47,24.53 300,26.4
Net_163 on TOP (solid shape): 306.4,20 304.53,15.47 300,13.6 300,19.99 300.01,20
Net_164 on TOP (solid shape): 20,20.01 19.99,20 13.6,20 15.47,24.53 20,26.4
Net_165 on TOP (solid shape): 26.4,20 24.53,15.47 20,13.6 20,19.99 20.01,20

## Text on the board
User.8: FIGURE | FINISHED_SIZE | 0.3302 | 0.8128 | 0.889 | 1.016 | 1.0201 | 1.143 | 1.3 | 2.8 | DRILL CHART: TOP to BOTTOM | ALL UNITS ARE IN MILLIMETERS | PLATED | NON-PLATED | QTY | 136 | 112 | 32 | 36 | 12 | 20 | 3
